# EAGLE board edition4-Sensor (EAGLE 9.6.2)
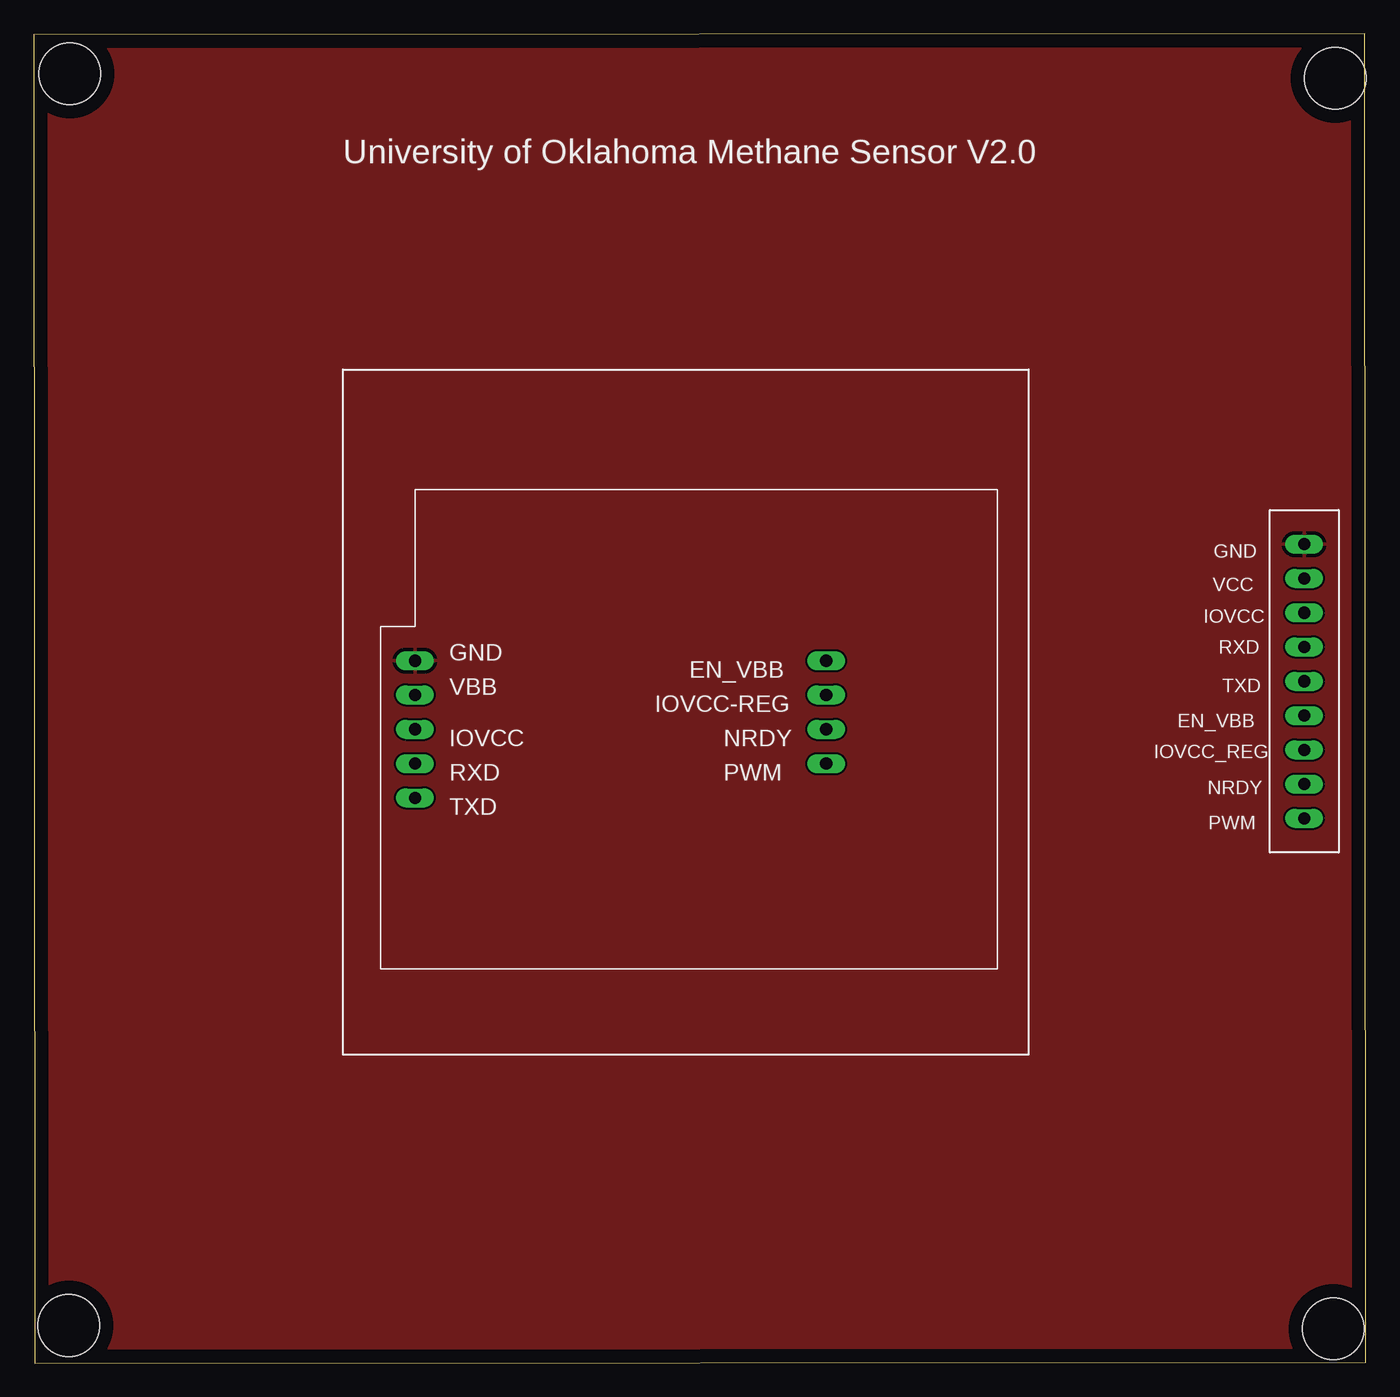
[diagram p0: board, top side]
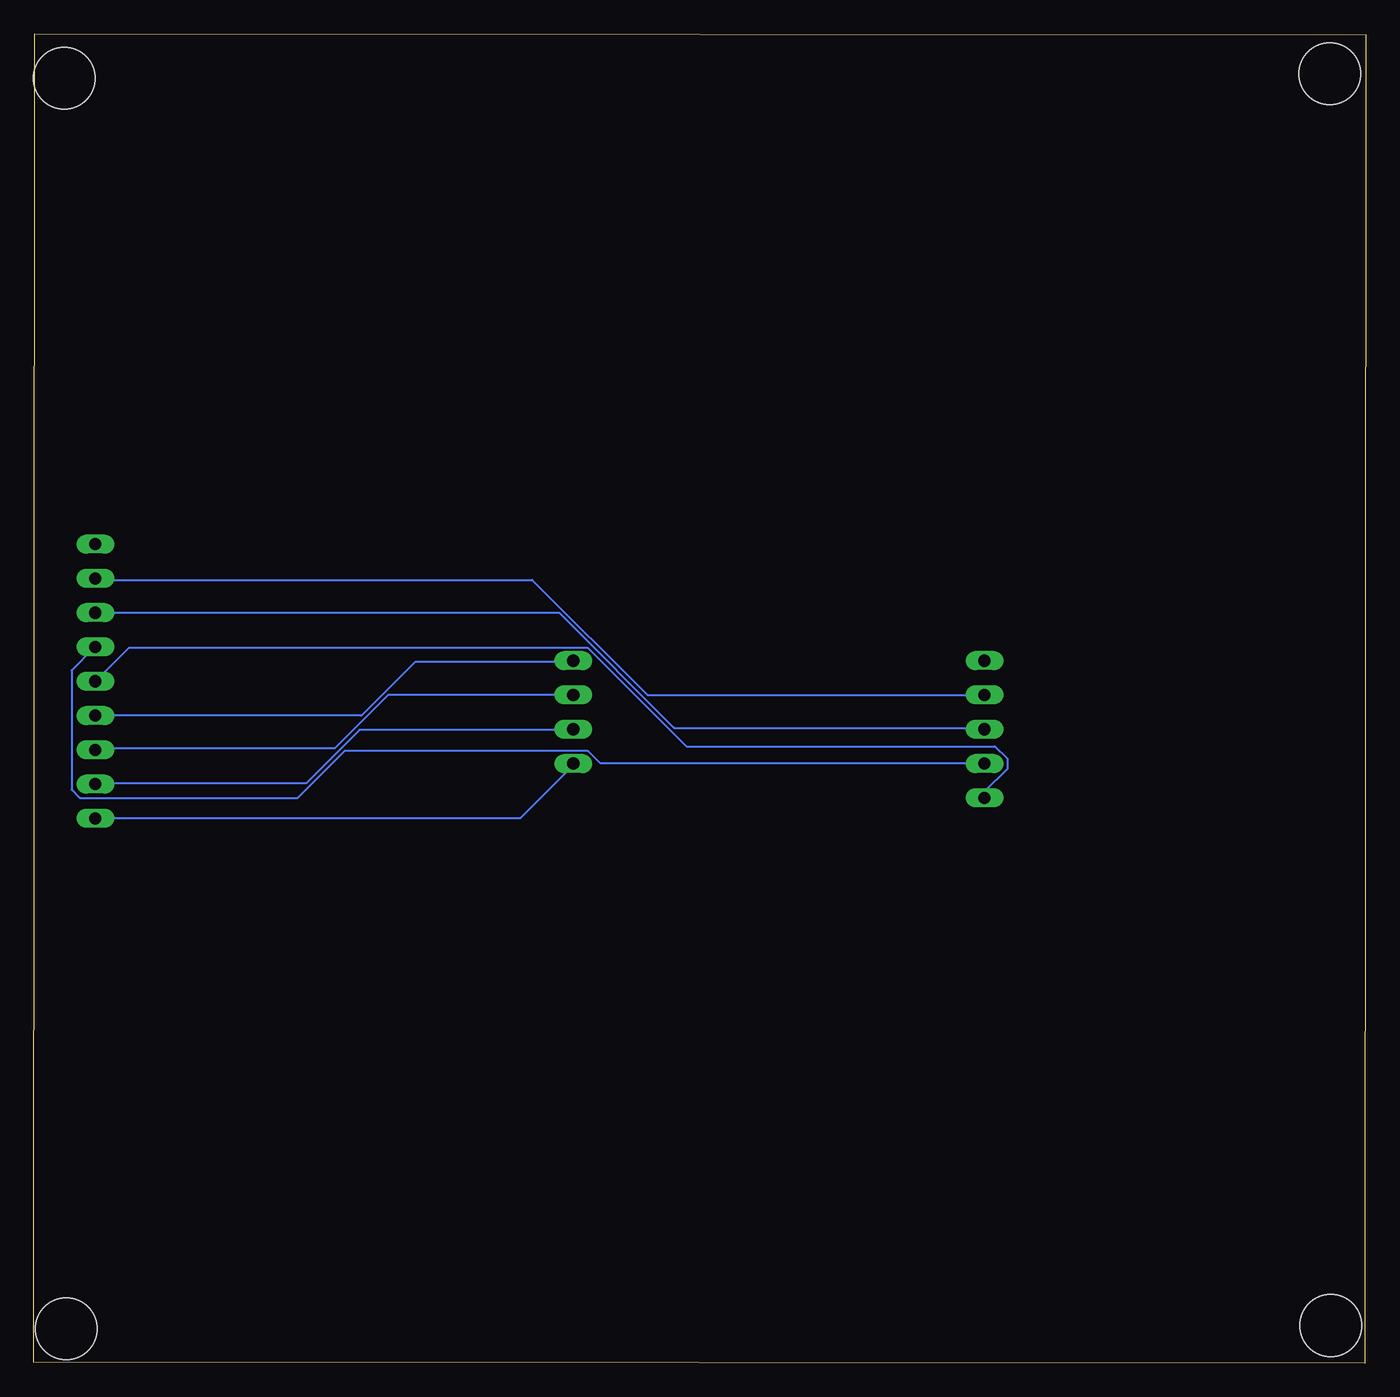
[diagram p1: board, bottom side, seen from below]

Size 98.73 x 98.54 mm. Coordinates in mm from the lower left corner, seen from the top.
Outline: 0.06,0 98.73,0.06 98.67,98.54 0,98.48 0.06,0
Copper layers (1*16): Top 0.035mm / dielectric 1.5mm / Bottom 0.035mm
Design rules "default": minimum track width 6mil, minimum drill 0.35mm, track to track 6mil, track to pad 6mil, pad to pad 6mil, via to via 6mil, smd to smd 6mil, copper to edge 40mil, drill to drill 6mil, minimum pad ring 10mil, minimum via ring 8mil, stop-mask expansion 4mil, vias tented up to drill 0mil, thermal gap 10mil
Holes 4.57 mm at 2.6,2.79 2.67,95.57 96.46,95.25 96.33,2.54

## Footprints (pad centres in the part's own frame; a part is rotated, then mirrored left to right if it is on the bottom)
K96SENSOR = drill 0.9 pad 1.143 long: P$1 -17.78,-5.08; P$2 -17.78,-7.62; P$3 -17.78,-10.16; P$4 -17.78,-12.7; P$5 -17.78,-15.24; P$6 12.7,-5.08; P$7 12.7,-7.62; P$8 12.7,-10.16; P$9 12.7,-12.7
9FEETPIN = drill 0.9 long: P$1 0,2.54; P$2 0,0; P$3 0,-2.54; P$4 0,-5.08; P$5 0,-7.62; P$6 0,-10.16; P$7 0,-12.7; P$8 0,-15.24; P$9 0,-17.78

## Placement (x,y rotation side)
U$1  K96SENSOR  [K96SENSOR]  46.04,57.15 0 top
U$2  9FEETPIN  [9FEETPIN]  94.17,58.17 0 top

## Library data of the parts
U$1 U$2 = untitled

## Nets
GND: U$1.P$1 U$2.P$1
N$2: U$1.P$2 U$2.P$2
N$3: U$1.P$3 U$2.P$3
N$4: U$1.P$4 U$2.P$4
N$5: U$1.P$5 U$2.P$5
N$6: U$1.P$6 U$2.P$6
N$7: U$1.P$7 U$2.P$7
N$8: U$1.P$8 U$2.P$8
N$9: U$1.P$9 U$2.P$9

## Tracks (layer width: path | path; a pad name or v marks a point on that pad's centre or on a via)
GND
  pour Top: 0.06,99.06 99.12,99.06 99.12,93.98 99.12,0 94.04,0 0.06,0
N$2
  Bottom 0.152: U$1.P$2 53.25,49.53 61.79,58.06 94.09,58.06 U$2.P$2
N$3
  Bottom 0.152: U$2.P$3 59.8,55.63 51.27,47.09 28.26,47.09 U$1.P$3
N$4
  Bottom 0.152: U$1.P$4 28.26,44.5 56.76,44.5 57.67,45.41 75.65,45.41 79.16,41.91 95.31,41.91 95.92,42.52 95.92,51.36 94.25,53.03 U$2.P$4
N$5
  Bottom 0.152: U$1.P$5 28.26,42.37 26.58,44.04 26.58,44.81 27.5,45.72 50.36,45.72 57.67,53.03 91.66,53.03 94.09,50.6 U$2.P$5
N$6
  Bottom 0.152: U$2.P$6 74.43,48.01 70.47,51.97 58.74,51.97 U$1.P$6
N$7
  Bottom 0.152: U$1.P$7 72.45,49.53 76.42,45.57 94.09,45.57 U$2.P$7
N$8
  Bottom 0.152: U$2.P$8 94.09,42.98 78.55,42.98 74.59,46.94 58.74,46.94 U$1.P$8
N$9
  Bottom 0.152: U$2.P$9 62.7,40.39 58.74,44.35 U$1.P$9

## Text on the board
tNames: University of Oklahoma Methane Sensor V2.0 | GND | VCC | IOVCC | RXD | TXD | EN_VBB | IOVCC_REG | NRDY | PWM